# Altium PCB VESC_POWER_75100.PcbDoc (part 2 of 2)
Units mil, origin at the board's own origin, x right, y up, seen from the top; angles counter-clockwise.
Board outline 2834.65 x 2047.24 mil, 4 copper layers (Top Layer, Layer 1, Layer 2, Bottom Layer), stack 62.599 mil thick; 50 components, 18 nets, 120 pads, 1348 vias.
Unrouted connection lines stored in the file: 2.
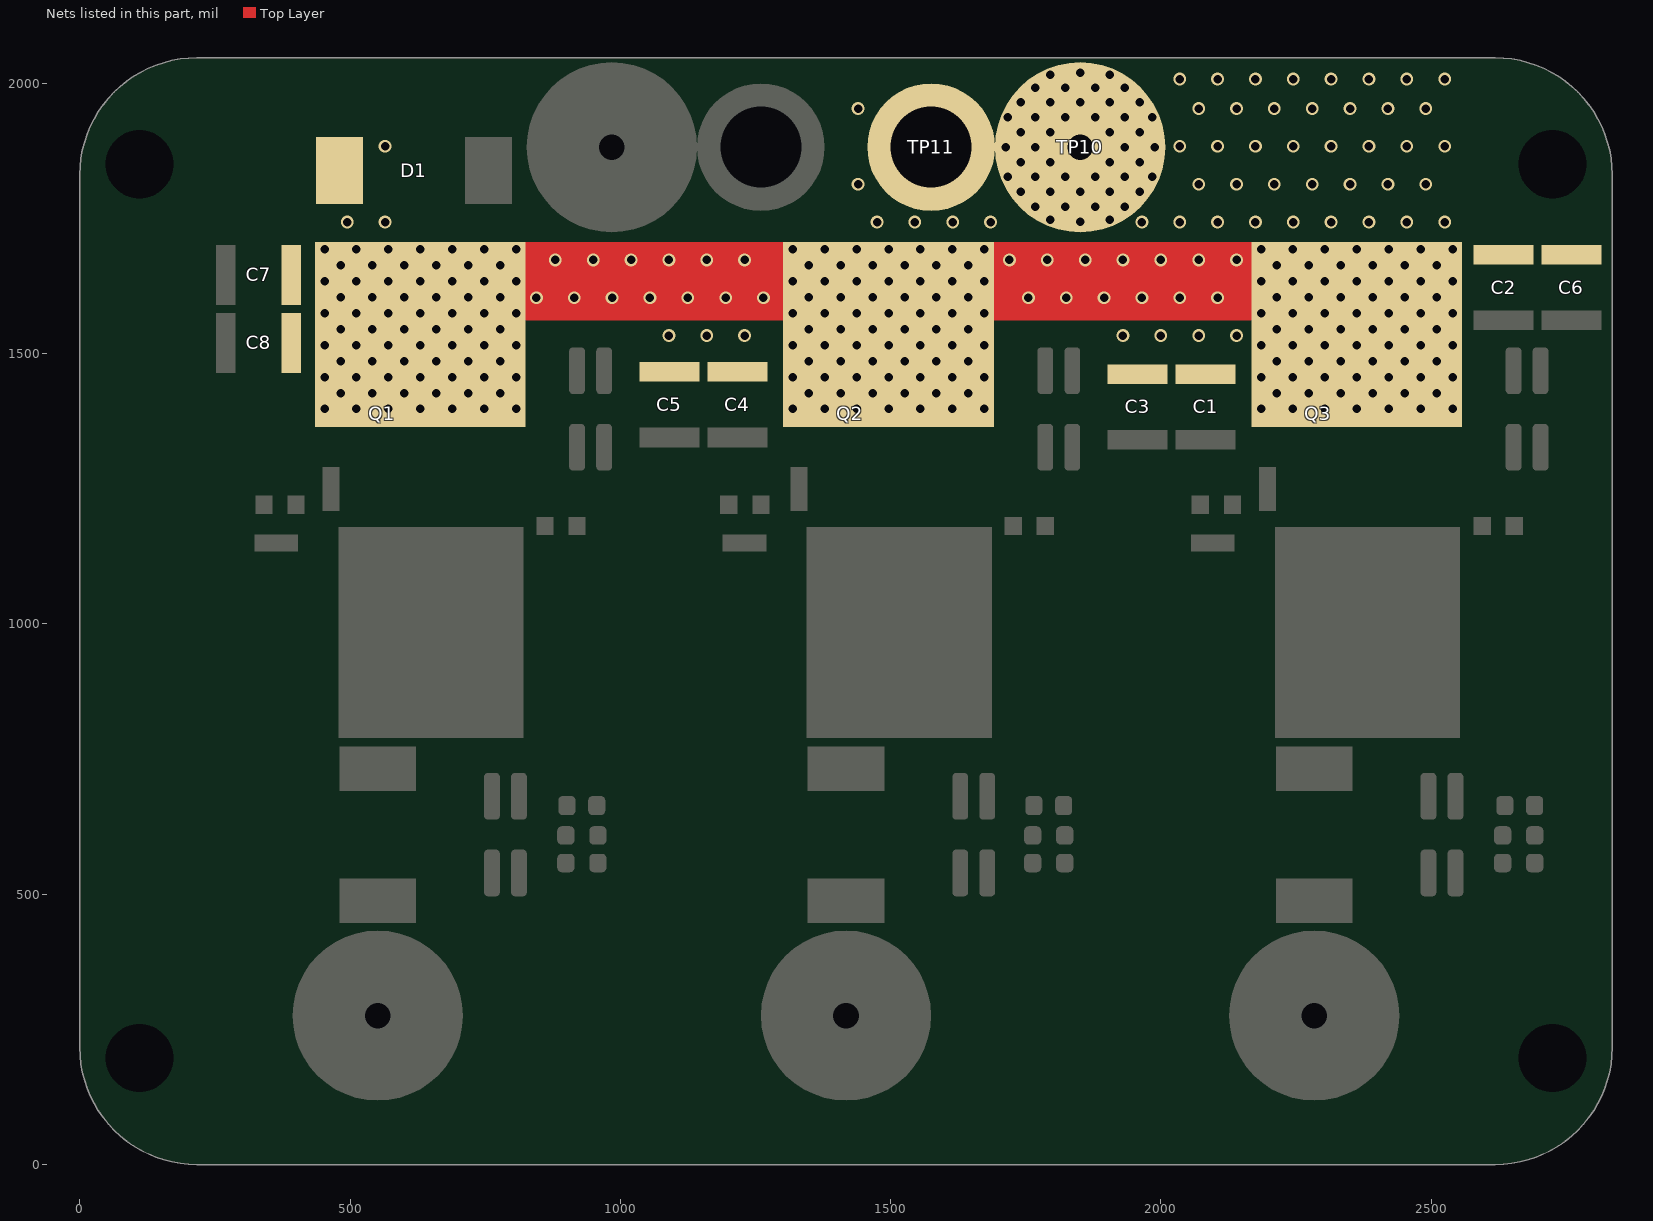
[diagram p4: the nets of this part, all layers, seen from the top]

## Via types
v1: diameter 23.62, hole 15.75, Top Layer to Bottom Layer, tented both sides, 1348 vias

## Nets (pads, with @x,y where several pads share a name; then routed paths per layer and width w, separated by ;. In a path a pad name is that pad's centre, name@x,y a point inside that pad or via, vN(x,y) a via of type N, cw(c..) or ccw(c..) an arc to the next point about the centre after c; other vN are vias at no path point) (continued)
VIN: C1.2 C2.2 C3.2 C4.2 C5.2 C6.2 C7.2 C8.2 D1.1 Q1.2 Q2.2 Q3.2 TP10.1 TP11.1 | length 2011
  Top Layer w19.68: v1(879.68,1673.43) 919.25,1633.86 919.88,1633.23 919.88,1609.69 915.44,1605.24 915.44,1603.74 v1@916.5,1602.67 ; v1(914.68,1603.43) 914.68,1602.36 v1@919.88,1597.16 ; v1(2509.84,1486.22) Q3.2@2527.56,1468.5
  Top Layer w145.67: Q1.2@629.92,1541.34 v1(629.92,1574.8) v1(629.92,1633.86) v1(688.98,1633.86) v1(748.03,1633.86) v1(807.09,1633.86) 919.25,1633.86 1019.68,1633.86 1089.68,1633.86 1264.68,1633.86 v1(1318.9,1633.86) v1(1377.95,1633.86) v1(1437.01,1633.86) v1(1496.06,1633.86) v1(1555.12,1633.86) v1(1614.17,1633.86) v1(1673.23,1633.86) 1824.68,1633.86 1929.68,1633.86 2034.68,1633.86 v1(2185.04,1633.86) v1(2244.09,1633.86) v1(2303.15,1633.86) v1(2362.2,1633.86) ; Q3.2@2362.2,1541.34 v1(2362.2,1574.8) Q3.2@2362.2,1604.33
  other v1: 452.76,1397.64 511.81,1397.64 570.87,1397.64 629.92,1397.64 688.98,1397.64 748.03,1397.64 807.09,1397.64 1318.9,1397.64 1377.95,1397.64 1437.01,1397.64 1496.06,1397.64 1555.12,1397.64 1614.17,1397.64 1673.23,1397.64 2185.04,1397.64 2244.09,1397.64 2303.15,1397.64 2362.2,1397.64 2421.26,1397.64 2480.31,1397.64 2539.37,1397.64 482.28,1427.17 541.34,1427.17 600.39,1427.17 659.45,1427.17 718.5,1427.17 777.56,1427.17 1348.43,1427.17 1407.48,1427.17 1466.54,1427.17 1525.59,1427.17 1584.65,1427.17 1643.7,1427.17 2214.57,1427.17 2273.62,1427.17 2332.68,1427.17 2391.73,1427.17 2450.79,1427.17 2509.84,1427.17 452.76,1456.69 511.81,1456.69 570.87,1456.69 629.92,1456.69 688.98,1456.69 748.03,1456.69 807.09,1456.69 1318.9,1456.69 1377.95,1456.69 1437.01,1456.69 1496.06,1456.69 1555.12,1456.69 1614.17,1456.69 1673.23,1456.69 2185.04,1456.69 2244.09,1456.69 2303.15,1456.69 2362.2,1456.69 2421.26,1456.69 2480.31,1456.69 2539.37,1456.69 482.28,1486.22 541.34,1486.22 600.39,1486.22 659.45,1486.22 718.5,1486.22 777.56,1486.22 1348.43,1486.22 1407.48,1486.22 1466.54,1486.22 1525.59,1486.22 1584.65,1486.22 1643.7,1486.22 2214.57,1486.22 2273.62,1486.22 2332.68,1486.22 2391.73,1486.22 2450.79,1486.22 452.76,1515.75 511.81,1515.75 570.87,1515.75 629.92,1515.75 688.98,1515.75 748.03,1515.75 807.09,1515.75 1318.9,1515.75 1377.95,1515.75 1437.01,1515.75 1496.06,1515.75 1555.12,1515.75 1614.17,1515.75 1673.23,1515.75 2185.04,1515.75 2244.09,1515.75 2303.15,1515.75 2362.2,1515.75 2421.26,1515.75 2480.31,1515.75 2539.37,1515.75 1089.68,1533.43 1159.68,1533.43 1229.68,1533.43 1929.68,1533.43 1999.68,1533.43 2069.68,1533.43 2139.68,1533.43 482.28,1545.28 541.34,1545.28 600.39,1545.28 659.45,1545.28 718.5,1545.28 777.56,1545.28 1348.43,1545.28 1407.48,1545.28 1466.54,1545.28 1525.59,1545.28 1584.65,1545.28 1643.7,1545.28 2214.57,1545.28 2273.62,1545.28 2332.68,1545.28 2391.73,1545.28 2450.79,1545.28 2509.84,1545.28 452.76,1574.8 511.81,1574.8 570.87,1574.8 688.98,1574.8 748.03,1574.8 807.09,1574.8 1318.9,1574.8 1377.95,1574.8 1437.01,1574.8 1496.06,1574.8 1555.12,1574.8 1614.17,1574.8 1673.23,1574.8 2185.04,1574.8 2244.09,1574.8 2303.15,1574.8 2421.26,1574.8 2480.31,1574.8 2539.37,1574.8 844.68,1603.43 984.68,1603.43 1054.68,1603.43 1124.68,1603.43 1194.68,1603.43 1264.68,1603.43 1754.68,1603.43 1824.68,1603.43 1894.68,1603.43 1964.68,1603.43 2034.68,1603.43 2104.68,1603.43 482.28,1604.33 541.34,1604.33 600.39,1604.33 659.45,1604.33 718.5,1604.33 777.56,1604.33 1348.43,1604.33 1407.48,1604.33 1466.54,1604.33 1525.59,1604.33 1584.65,1604.33 1643.7,1604.33 2214.57,1604.33 2273.62,1604.33 2332.68,1604.33 2391.73,1604.33 2450.79,1604.33 2509.84,1604.33 452.76,1633.86 511.81,1633.86 570.87,1633.86 2421.26,1633.86 2480.31,1633.86 2539.37,1633.86 482.28,1663.39 541.34,1663.39 600.39,1663.39 659.45,1663.39 718.5,1663.39 777.56,1663.39 1348.43,1663.39 1407.48,1663.39 1466.54,1663.39 1525.59,1663.39 1584.65,1663.39 1643.7,1663.39 2214.57,1663.39 2273.62,1663.39 2332.68,1663.39 2391.73,1663.39 2450.79,1663.39 2509.84,1663.39 949.68,1673.43 1019.68,1673.43 1089.68,1673.43 1159.68,1673.43 1229.68,1673.43 1719.68,1673.43 1789.68,1673.43 1859.68,1673.43 1929.68,1673.43 1999.68,1673.43 2069.68,1673.43 2139.68,1673.43 452.76,1692.91 511.81,1692.91 570.87,1692.91 629.92,1692.91 688.98,1692.91 748.03,1692.91 807.09,1692.91 1318.9,1692.91 1377.95,1692.91 1437.01,1692.91 1496.06,1692.91 1555.12,1692.91 1614.17,1692.91 1673.23,1692.91 2185.04,1692.91 2244.09,1692.91 2303.15,1692.91 2362.2,1692.91 2421.26,1692.91 2480.31,1692.91 2539.37,1692.91 494.68,1743.43 564.68,1743.43 1474.68,1743.43 1544.68,1743.43 1614.68,1743.43 1684.68,1743.43 1964.68,1743.43 2034.68,1743.43 2104.68,1743.43 2174.68,1743.43 2244.68,1743.43 2314.68,1743.43 2384.68,1743.43 2454.68,1743.43 2524.68,1743.43 1850.39,1744.09 1795.28,1748.03 1905.51,1748.03 1767.72,1771.65 1822.83,1771.65 1877.95,1771.65 1933.07,1771.65 1740.16,1799.21 1795.28,1799.21 1850.39,1799.21 1905.51,1799.21 1960.63,1799.21 1439.68,1813.43 2069.68,1813.43 2139.68,1813.43 2209.68,1813.43 2279.68,1813.43 2349.68,1813.43 2419.68,1813.43 2489.68,1813.43 1716.54,1826.77 1767.72,1826.77 1822.83,1826.77 1877.95,1826.77 1933.07,1826.77 1984.25,1826.77 1740.16,1854.33 1795.28,1854.33 1905.51,1854.33 1960.63,1854.33 1712.6,1881.89 1767.72,1881.89 1933.07,1881.89 1988.19,1881.89 564.68,1883.43 2034.68,1883.43 2104.68,1883.43 2174.68,1883.43 2244.68,1883.43 2314.68,1883.43 2384.68,1883.43 2454.68,1883.43 2524.68,1883.43 1740.16,1909.45 1795.28,1909.45 1905.51,1909.45 1960.63,1909.45 1716.54,1937.01 1767.72,1937.01 1822.83,1937.01 1877.95,1937.01 1933.07,1937.01 1984.25,1937.01 1439.68,1953.43 2069.68,1953.43 2139.68,1953.43 2209.68,1953.43 2279.68,1953.43 2349.68,1953.43 2419.68,1953.43 2489.68,1953.43 1740.16,1964.57 1795.28,1964.57 1850.39,1964.57 1905.51,1964.57 1960.63,1964.57 1767.72,1992.13 1822.83,1992.13 1877.95,1992.13 1933.07,1992.13 2034.68,2007.87 2104.68,2007.87 2174.68,2007.87 2244.68,2007.87 2314.68,2007.87 2384.68,2007.87 2454.68,2007.87 2524.68,2007.87 1795.28,2015.75 1905.51,2015.75 1850.39,2019.69
pads on no net: TP4.1 TP5.1 TP6.1 TP7.1

## Polygon pours and split planes (outlines as drawn)
GND on Top Layer "GND_L01_P130" (solid, remove dead copper, pour order 130): 0,216.54 ccw(c216.54,216.54) 216.54,0 2618.11,0 ccw(c2618.11,216.54) 2834.65,216.54 2834.65,1830.71 ccw(c2618.11,1830.71) 2618.11,2047.24 216.54,2047.24 ccw(c216.54,1830.71) 0,1830.71
SHC on Top Layer "SHC_L01_P105" (solid, pour order 105): 2204.72,694.17 2204.72,1181.11 cw(c2212.6,1181.11) 2212.6,1188.98 ccw(c2212.6,1196.85) 2220.47,1196.85 2220.47,1290.83 cw(c2233.61,1290.83) 2233.61,1303.97 2601.55,1303.97 cw(c2601.55,1291.34) 2614.17,1291.34 2614.17,803.15 cw(c2590.55,803.15) 2590.55,779.53 2385.83,779.53 ccw(c2385.83,755.91) 2362.2,755.91 2362.2,694.17 cw(c2355.04,694.17) 2355.04,687.01 2211.89,687.01 cw(c2211.89,694.17)
SHB on Top Layer "SHB_L01_P103" (solid, pour order 103): 1338.58,694.17 1338.58,1181.11 cw(c1346.46,1181.11) 1346.46,1188.98 ccw(c1346.46,1196.85) 1354.33,1196.85 1354.33,1290.83 cw(c1367.47,1290.83) 1367.47,1303.97 1735.41,1303.97 cw(c1735.41,1291.34) 1748.03,1291.34 1748.03,803.15 cw(c1724.41,803.15) 1724.41,779.53 1519.69,779.53 ccw(c1519.69,755.91) 1496.06,755.91 1496.06,694.17 cw(c1488.9,694.17) 1488.9,687.01 1345.75,687.01 cw(c1345.74,694.17)
SHA on Top Layer "SHA_L01_P102" (solid, pour order 102): 472.44,694.17 472.44,1181.11 cw(c480.32,1181.11) 480.32,1188.98 ccw(c480.32,1196.85) 488.19,1196.85 488.19,1290.83 cw(c501.32,1290.83) 501.32,1303.97 869.27,1303.97 cw(c869.27,1291.34) 881.89,1291.34 881.89,803.15 cw(c858.27,803.15) 858.27,779.53 653.54,779.53 ccw(c653.54,755.91) 629.92,755.91 629.92,694.17 cw(c622.76,694.17) 622.76,687.01 479.6,687.01 cw(c479.6,694.17)
VIN on Top Layer "Top Layer-VIN" (solid, remove dead copper, pour order 128): 340.43,1383.97 ccw(c362.2,1383.97) 362.2,1362.2 826.77,1362.2 ccw(c826.78,1377.94) 842.52,1377.95 842.52,1519.68 cw(c858.27,1519.68) 858.27,1535.43 992.13,1535.43 cw(c992.13,1519.69) 1007.87,1519.69 1007.87,1448.82 ccw(c1023.62,1448.82) 1023.62,1433.07 1259.84,1433.07 cw(c1259.84,1409.45) 1283.46,1409.45 1283.46,1377.95 ccw(c1299.21,1377.95) 1299.21,1362.2 1692.91,1362.2 ccw(c1692.92,1377.95) 1708.66,1377.95 1708.66,1511.81 cw(c1732.28,1511.81) 1732.28,1535.43 1858.27,1535.43 cw(c1858.27,1511.81) 1881.89,1511.81 1881.89,1448.82 ccw(c1897.64,1448.82) 1897.64,1433.07 2133.86,1433.07 cw(c2133.86,1417.33) 2149.61,1417.32 2149.61,1370.08 ccw(c2157.48,1370.08) 2157.48,1362.2 2559.05,1362.2 ccw(c2559.06,1370.07) 2566.93,1370.08 2566.93,1593.78 cw(c2587.32,1593.78) 2587.32,1614.17 2828.08,1614.17 2828.08,1726.73 2587.32,1726.73 cw(c2587.32,1747.12) 2566.93,1747.12 2566.93,2047.24 1417.32,2047.24 1417.32,1732.28 cw(c1396.03,1732.28) 1396.03,1710.99 626.69,1710.99 cw(c626.69,1731.38) 606.3,1731.38 606.3,1889.76 ccw(c582.68,1889.77) 582.68,1913.39 362.2,1913.38 ccw(c362.2,1891.62) 340.43,1891.61
PHA on Top Layer "PHA_L01_P096" (solid, pour order 96): 354.33,385.83 cw(c401.57,385.83) 401.57,433.07 448.82,433.07 ccw(c448.82,456.69) 472.44,456.69 472.44,527.56 cw(c480.32,527.56) 480.32,535.43 622.05,535.43 cw(c622.05,527.56) 629.92,527.56 629.92,456.69 ccw(c653.54,456.69) 653.54,433.07 708.66,433.07 cw(c708.66,385.83) 755.91,385.83 755.91,133.86 cw(c732.28,133.86) 732.28,110.24 377.95,110.24 cw(c377.95,133.86) 354.33,133.86
PHB on Top Layer "PHB_L01_P097" (solid, pour order 97): 1216.54,385.83 cw(c1263.78,385.83) 1263.78,433.07 1311.02,433.07 ccw(c1311.02,456.69) 1334.65,456.69 1334.65,527.56 cw(c1342.52,527.56) 1342.52,535.43 1484.25,535.43 cw(c1484.25,527.56) 1492.13,527.56 1492.13,456.69 ccw(c1515.75,456.69) 1515.75,433.07 1570.87,433.07 cw(c1570.87,385.83) 1618.11,385.83 1618.11,133.86 cw(c1594.49,133.86) 1594.49,110.24 1240.16,110.24 cw(c1240.16,133.86) 1216.54,133.86
PHC on Top Layer "PHC_L01_P101" (solid, pour order 101): 2082.68,385.83 cw(c2129.92,385.83) 2129.92,433.07 2177.17,433.07 ccw(c2177.17,456.69) 2200.79,456.69 2200.79,527.56 cw(c2208.66,527.56) 2208.66,535.43 2350.39,535.43 cw(c2350.39,527.56) 2358.27,527.56 2358.27,456.69 ccw(c2381.89,456.69) 2381.89,433.07 2437.01,433.07 cw(c2437.01,385.83) 2484.25,385.83 2484.25,133.86 cw(c2460.63,133.86) 2460.63,110.24 2106.3,110.24 cw(c2106.3,133.86) 2082.68,133.86
GND on Layer 1 "GND_L02_P111" (solid, pour order 111): 0,216.54 ccw(c216.54,216.54) 216.54,0 2618.11,0 ccw(c2618.11,216.54) 2834.65,216.54 2834.65,1830.71 ccw(c2618.11,1830.71) 2618.11,2047.24 216.54,2047.24 ccw(c216.54,1830.71) 0,1830.71
VIN on Layer 1 "VIN_L02_P110" (solid, pour order 110): 362.2,1362.2 cw(c362.2,1383.97) 340.43,1383.98 340.43,1891.61 cw(c362.2,1891.61) 362.2,1913.39 582.68,1913.39 cw(c582.68,1889.77) 606.3,1889.76 606.3,1740.16 ccw(c629.92,1740.16) 629.92,1716.54 1407.48,1716.54 ccw(c1407.48,1726.38) 1417.32,1726.38 1417.32,2047.24 2566.93,2047.24 2566.93,1370.08 cw(c2559.06,1370.08) 2559.06,1362.2 2157.48,1362.2 cw(c2157.48,1370.08) 2149.61,1370.08 2149.61,1417.32 ccw(c2133.86,1417.32) 2133.86,1433.07 1897.64,1433.07 cw(c1897.64,1448.82) 1881.89,1448.82 1881.89,1511.81 ccw(c1858.27,1511.81) 1858.27,1535.43 1732.28,1535.43 ccw(c1732.28,1511.81) 1708.66,1511.81 1708.66,1377.95 cw(c1692.92,1377.95) 1692.91,1362.2 1299.21,1362.2 cw(c1299.21,1377.95) 1283.46,1377.95 1283.46,1409.45 ccw(c1259.84,1409.45) 1259.84,1433.07 1023.62,1433.07 cw(c1023.62,1448.82) 1007.87,1448.82 1007.87,1519.69 ccw(c992.13,1519.69) 992.13,1535.43 858.27,1535.43 ccw(c858.27,1519.68) 842.52,1519.68 842.52,1377.95 cw(c826.78,1377.95) 826.77,1362.2
PHC on Layer 1 "PHC_L02_P100" (solid, pour order 100): 2082.68,385.83 cw(c2129.92,385.83) 2129.92,433.07 2177.17,433.07 ccw(c2177.17,456.69) 2200.79,456.69 2200.79,527.56 cw(c2208.66,527.56) 2208.66,535.43 2350.39,535.43 cw(c2350.39,527.56) 2358.27,527.56 2358.27,456.69 ccw(c2381.89,456.69) 2381.89,433.07 2437.01,433.07 cw(c2437.01,385.83) 2484.25,385.83 2484.25,133.86 cw(c2460.63,133.86) 2460.63,110.24 2106.3,110.24 cw(c2106.3,133.86) 2082.68,133.86
PHA on Layer 1 "PHA_L02_P098" (solid, pour order 98): 354.33,385.83 cw(c401.57,385.83) 401.57,433.07 448.82,433.07 ccw(c448.82,456.69) 472.44,456.69 472.44,527.56 cw(c480.32,527.56) 480.32,535.43 622.05,535.43 cw(c622.05,527.56) 629.92,527.56 629.92,456.69 ccw(c653.54,456.69) 653.54,433.07 708.66,433.07 cw(c708.66,385.83) 755.91,385.83 755.91,133.86 cw(c732.28,133.86) 732.28,110.24 377.95,110.24 cw(c377.95,133.86) 354.33,133.86
PHB on Layer 1 "PHB_L02_P099" (solid, pour order 99): 1216.54,385.83 cw(c1263.78,385.83) 1263.78,433.07 1311.02,433.07 ccw(c1311.02,456.69) 1334.65,456.69 1334.65,527.56 cw(c1342.52,527.56) 1342.52,535.43 1484.25,535.43 cw(c1484.25,527.56) 1492.13,527.56 1492.13,456.69 ccw(c1515.75,456.69) 1515.75,433.07 1570.87,433.07 cw(c1570.87,385.83) 1618.11,385.83 1618.11,133.86 cw(c1594.49,133.86) 1594.49,110.24 1240.16,110.24 cw(c1240.16,133.86) 1216.54,133.86
SHC on Layer 1 "SHC_L02_P106" (solid, pour order 106): 2204.72,692.2 2204.72,1179.14 cw(c2212.6,1179.14) 2212.6,1187.01 ccw(c2212.6,1194.88) 2220.47,1194.88 2220.47,1288.86 cw(c2233.61,1288.86) 2233.61,1302 2601.55,1302 cw(c2601.55,1289.37) 2614.17,1289.37 2614.17,801.18 cw(c2590.55,801.18) 2590.55,777.56 2385.83,777.56 ccw(c2385.83,753.94) 2362.2,753.94 2362.2,692.2 cw(c2355.04,692.2) 2355.04,685.04 2211.89,685.04 cw(c2211.89,692.2)
SHB on Layer 1 "SHB_L02_P108" (solid, pour order 108): 1338.58,692.2 1338.58,1179.14 cw(c1346.46,1179.14) 1346.46,1187.01 ccw(c1346.46,1194.88) 1354.33,1194.88 1354.33,1288.86 cw(c1367.47,1288.86) 1367.47,1302 1735.41,1302 cw(c1735.41,1289.37) 1748.03,1289.37 1748.03,801.18 cw(c1724.41,801.18) 1724.41,777.56 1519.69,777.56 ccw(c1519.69,753.94) 1496.06,753.94 1496.06,692.2 cw(c1488.9,692.2) 1488.9,685.04 1345.75,685.04 cw(c1345.74,692.2)
SHA on Layer 1 "SHA_L02_P104" (solid, pour order 104): 472.44,694.17 472.44,1181.1 cw(c480.32,1181.1) 480.32,1188.98 ccw(c480.32,1196.85) 488.19,1196.85 488.19,1290.83 cw(c501.32,1290.83) 501.32,1303.96 869.27,1303.96 cw(c869.27,1291.34) 881.89,1291.34 881.89,803.15 cw(c858.27,803.15) 858.27,779.53 653.54,779.53 ccw(c653.54,755.91) 629.92,755.91 629.92,694.17 cw(c622.76,694.17) 622.76,687.01 479.6,687.01 cw(c479.6,694.17)
GND on Layer 2 "GND_L03_P119" (solid, pour order 119): 0,216.54 ccw(c216.54,216.54) 216.54,0 2618.11,0 ccw(c2618.11,216.54) 2834.65,216.54 2834.65,1830.71 ccw(c2618.11,1830.71) 2618.11,2047.24 216.54,2047.24 ccw(c216.54,1830.71) 0,1830.71
VIN on Layer 2 "VIN_L03_P118" (solid, pour order 118): 362.2,1362.2 cw(c362.2,1383.97) 340.43,1383.98 340.43,1891.61 cw(c362.2,1891.61) 362.2,1913.39 582.68,1913.39 cw(c582.68,1889.77) 606.3,1889.76 606.3,1740.16 ccw(c629.92,1740.16) 629.92,1716.54 1407.48,1716.54 ccw(c1407.48,1726.38) 1417.32,1726.38 1417.32,2047.24 2566.93,2047.24 2566.93,1370.08 cw(c2559.06,1370.08) 2559.06,1362.2 2157.48,1362.2 cw(c2157.48,1370.08) 2149.61,1370.08 2149.61,1417.32 ccw(c2133.86,1417.32) 2133.86,1433.07 1897.64,1433.07 cw(c1897.64,1448.82) 1881.89,1448.82 1881.89,1511.81 ccw(c1858.27,1511.81) 1858.27,1535.43 1732.28,1535.43 ccw(c1732.28,1511.81) 1708.66,1511.81 1708.66,1377.95 cw(c1692.92,1377.95) 1692.91,1362.2 1299.21,1362.2 cw(c1299.21,1377.95) 1283.46,1377.95 1283.46,1409.45 ccw(c1259.84,1409.45) 1259.84,1433.07 1023.62,1433.07 cw(c1023.62,1448.82) 1007.87,1448.82 1007.87,1519.69 ccw(c992.13,1519.69) 992.13,1535.43 858.27,1535.43 ccw(c858.27,1519.68) 842.52,1519.68 842.52,1377.95 cw(c826.78,1377.95) 826.77,1362.2
PHC on Layer 2 "PHC_L03_P114" (solid, pour order 114): 2082.68,385.83 cw(c2129.92,385.83) 2129.92,433.07 2177.17,433.07 ccw(c2177.17,456.69) 2200.79,456.69 2200.79,527.56 cw(c2208.66,527.56) 2208.66,535.43 2350.39,535.43 cw(c2350.39,527.56) 2358.27,527.56 2358.27,456.69 ccw(c2381.89,456.69) 2381.89,433.07 2437.01,433.07 cw(c2437.01,385.83) 2484.25,385.83 2484.25,133.86 cw(c2460.63,133.86) 2460.63,110.24 2106.3,110.24 cw(c2106.3,133.86) 2082.68,133.86
PHB on Layer 2 "PHB_L03_P113" (solid, pour order 113): 1216.54,385.83 cw(c1263.78,385.83) 1263.78,433.07 1311.02,433.07 ccw(c1311.02,456.69) 1334.65,456.69 1334.65,527.56 cw(c1342.52,527.56) 1342.52,535.43 1484.25,535.43 cw(c1484.25,527.56) 1492.13,527.56 1492.13,456.69 ccw(c1515.75,456.69) 1515.75,433.07 1570.87,433.07 cw(c1570.87,385.83) 1618.11,385.83 1618.11,133.86 cw(c1594.49,133.86) 1594.49,110.24 1240.16,110.24 cw(c1240.16,133.86) 1216.54,133.86
PHA on Layer 2 "PHA_L03_P112" (solid, pour order 112): 354.33,385.83 cw(c401.57,385.83) 401.57,433.07 448.82,433.07 ccw(c448.82,456.69) 472.44,456.69 472.44,527.56 cw(c480.32,527.56) 480.32,535.43 622.05,535.43 cw(c622.05,527.56) 629.92,527.56 629.92,456.69 ccw(c653.54,456.69) 653.54,433.07 708.66,433.07 cw(c708.66,385.83) 755.91,385.83 755.91,133.86 cw(c732.28,133.86) 732.28,110.24 377.95,110.24 cw(c377.95,133.86) 354.33,133.86
SHC on Layer 2 "SHC_L03_P117" (solid, pour order 117): 2204.72,692.2 2204.72,1179.14 cw(c2212.6,1179.14) 2212.6,1187.01 ccw(c2212.6,1194.88) 2220.47,1194.88 2220.47,1288.86 cw(c2233.61,1288.86) 2233.61,1302 2601.55,1302 cw(c2601.55,1289.37) 2614.17,1289.37 2614.17,801.18 cw(c2590.55,801.18) 2590.55,777.56 2385.83,777.56 ccw(c2385.83,753.94) 2362.2,753.94 2362.2,692.2 cw(c2355.04,692.2) 2355.04,685.04 2211.89,685.04 cw(c2211.89,692.2)
SHB on Layer 2 "SHB_L03_P116" (solid, pour order 116): 1338.58,692.2 1338.58,1179.14 cw(c1346.46,1179.14) 1346.46,1187.01 ccw(c1346.46,1194.88) 1354.33,1194.88 1354.33,1288.86 cw(c1367.47,1288.86) 1367.47,1302 1735.41,1302 cw(c1735.41,1289.37) 1748.03,1289.37 1748.03,801.18 cw(c1724.41,801.18) 1724.41,777.56 1519.69,777.56 ccw(c1519.69,753.94) 1496.06,753.94 1496.06,692.2 cw(c1488.9,692.2) 1488.9,685.04 1345.75,685.04 cw(c1345.74,692.2)
SHA on Layer 2 "SHA_L03_P115" (solid, pour order 115): 472.44,694.17 472.44,1181.1 cw(c480.32,1181.1) 480.32,1188.98 ccw(c480.32,1196.85) 488.19,1196.85 488.19,1290.83 cw(c501.32,1290.83) 501.32,1303.96 869.27,1303.96 cw(c869.27,1291.34) 881.89,1291.34 881.89,803.15 cw(c858.27,803.15) 858.27,779.53 653.54,779.53 ccw(c653.54,755.91) 629.92,755.91 629.92,694.17 cw(c622.76,694.17) 622.76,687.01 479.6,687.01 cw(c479.6,694.17)
GND on Bottom Layer "GND_L04_P127" (solid, pour order 127): 0,216.54 ccw(c216.54,216.54) 216.54,0 2618.11,0 ccw(c2618.11,216.54) 2834.65,216.54 2834.65,1830.71 ccw(c2618.11,1830.71) 2618.11,2047.24 216.54,2047.24 ccw(c216.54,1830.71) 0,1830.71
VIN on Bottom Layer "VIN_L04_P126" (solid, pour order 126): 362.2,1362.2 cw(c362.2,1383.97) 340.43,1383.98 340.43,1891.61 cw(c362.2,1891.61) 362.2,1913.39 582.68,1913.39 cw(c582.68,1889.77) 606.3,1889.76 606.3,1740.16 ccw(c629.92,1740.16) 629.92,1716.54 1407.48,1716.54 ccw(c1407.48,1726.38) 1417.32,1726.38 1417.32,2047.24 2566.93,2047.24 2566.93,1370.08 cw(c2559.06,1370.08) 2559.06,1362.2 2157.48,1362.2 cw(c2157.48,1370.08) 2149.61,1370.08 2149.61,1417.32 ccw(c2133.86,1417.32) 2133.86,1433.07 1897.64,1433.07 cw(c1897.64,1448.82) 1881.89,1448.82 1881.89,1511.81 ccw(c1858.27,1511.81) 1858.27,1535.43 1732.28,1535.43 ccw(c1732.28,1511.81) 1708.66,1511.81 1708.66,1377.95 cw(c1692.92,1377.95) 1692.91,1362.2 1299.21,1362.2 cw(c1299.21,1377.95) 1283.46,1377.95 1283.46,1409.45 ccw(c1259.84,1409.45) 1259.84,1433.07 1023.62,1433.07 cw(c1023.62,1448.82) 1007.87,1448.82 1007.87,1519.69 ccw(c992.13,1519.69) 992.13,1535.43 858.27,1535.43 ccw(c858.27,1519.68) 842.52,1519.68 842.52,1377.95 cw(c826.78,1377.95) 826.77,1362.2
PHC on Bottom Layer "PHC_L04_P122" (solid, pour order 122): 2082.68,385.83 cw(c2129.92,385.83) 2129.92,433.07 2177.17,433.07 ccw(c2177.17,456.69) 2200.79,456.69 2200.79,527.56 cw(c2208.66,527.56) 2208.66,535.43 2350.39,535.43 cw(c2350.39,527.56) 2358.27,527.56 2358.27,456.69 ccw(c2381.89,456.69) 2381.89,433.07 2437.01,433.07 cw(c2437.01,385.83) 2484.25,385.83 2484.25,133.86 cw(c2460.63,133.86) 2460.63,110.24 2106.3,110.24 cw(c2106.3,133.86) 2082.68,133.86
PHB on Bottom Layer "PHB_L04_P121" (solid, pour order 121): 1216.54,385.83 cw(c1263.78,385.83) 1263.78,433.07 1311.02,433.07 ccw(c1311.02,456.69) 1334.65,456.69 1334.65,527.56 cw(c1342.52,527.56) 1342.52,535.43 1484.25,535.43 cw(c1484.25,527.56) 1492.13,527.56 1492.13,456.69 ccw(c1515.75,456.69) 1515.75,433.07 1570.87,433.07 cw(c1570.87,385.83) 1618.11,385.83 1618.11,133.86 cw(c1594.49,133.86) 1594.49,110.24 1240.16,110.24 cw(c1240.16,133.86) 1216.54,133.86
PHA on Bottom Layer "PHA_L04_P120" (solid, pour order 120): 354.33,385.83 cw(c401.57,385.83) 401.57,433.07 448.82,433.07 ccw(c448.82,456.69) 472.44,456.69 472.44,527.56 cw(c480.32,527.56) 480.32,535.43 622.05,535.43 cw(c622.05,527.56) 629.92,527.56 629.92,456.69 ccw(c653.54,456.69) 653.54,433.07 708.66,433.07 cw(c708.66,385.83) 755.91,385.83 755.91,133.86 cw(c732.28,133.86) 732.28,110.24 377.95,110.24 cw(c377.95,133.86) 354.33,133.86
SHC on Bottom Layer "SHC_L04_P125" (solid, pour order 125): 2204.72,692.2 2204.72,1179.14 cw(c2212.6,1179.14) 2212.6,1187.01 ccw(c2212.6,1194.88) 2220.47,1194.88 2220.47,1288.86 cw(c2233.61,1288.86) 2233.61,1302 2601.55,1302 cw(c2601.55,1289.37) 2614.17,1289.37 2614.17,801.18 cw(c2590.55,801.18) 2590.55,777.56 2385.83,777.56 ccw(c2385.83,753.94) 2362.2,753.94 2362.2,692.2 cw(c2355.04,692.2) 2355.04,685.04 2211.89,685.04 cw(c2211.89,692.2)
SHB on Bottom Layer "SHB_L04_P124" (solid, pour order 124): 1338.58,692.2 1338.58,1179.14 cw(c1346.46,1179.14) 1346.46,1187.01 ccw(c1346.46,1194.88) 1354.33,1194.88 1354.33,1288.86 cw(c1367.47,1288.86) 1367.47,1302 1735.41,1302 cw(c1735.41,1289.37) 1748.03,1289.37 1748.03,801.18 cw(c1724.41,801.18) 1724.41,777.56 1519.69,777.56 ccw(c1519.69,753.94) 1496.06,753.94 1496.06,692.2 cw(c1488.9,692.2) 1488.9,685.04 1345.75,685.04 cw(c1345.74,692.2)
SHA on Bottom Layer "SHA_L04_P123" (solid, pour order 123): 472.44,694.17 472.44,1181.1 cw(c480.32,1181.1) 480.32,1188.98 ccw(c480.32,1196.85) 488.19,1196.85 488.19,1290.83 cw(c501.32,1290.83) 501.32,1303.96 869.27,1303.96 cw(c869.27,1291.34) 881.89,1291.34 881.89,803.15 cw(c858.27,803.15) 858.27,779.53 653.54,779.53 ccw(c653.54,755.91) 629.92,755.91 629.92,694.17 cw(c622.76,694.17) 622.76,687.01 479.6,687.01 cw(c479.6,694.17)

## Keep-outs
Keep-Out Layer:
  lines w1: 2618.11,0 ccw(c2618.11,216.54) 2834.65,216.54 2834.65,1830.71 ccw(c2618.11,1830.71) 2618.11,2047.24 ; 2618.11,0 216.54,0 cw(c216.54,216.54) 0,216.54 0,1830.71 cw(c216.54,1830.71) 216.54,2047.24 2618.11,2047.24 ; 2618.11,2047.24 2618.11,2047.24

## Silkscreen, mask and mechanical layers (free items; w line width, h text height)
Top Overlay:
  text "-" at 1123.37,1964.58 h78.74
  text "+" at 1654.86,1960.64 h78.74
  text "U" at 731.58,214.23 h196.85
  text "V" at 1603.46,214.23 h196.85
  text "W" at 2454.52,214.23 h196.85
  text "REV D" at 2482.44,80.87 h31.5
  text "PS 4/7" at 2482.44,31.29 h31.5
Top Solder:
  lines w30: 39.37,316.77 39.37,416.77 ; 39.37,505.17 39.37,605.17 ; 39.37,693.57 39.37,793.57 ; 39.37,881.96 39.37,981.96 ; 39.37,1070.36 39.37,1170.36 ; 39.37,1258.76 39.37,1358.76 ; 39.37,1447.15 39.37,1547.15 ; 39.37,1635.55 39.37,1735.55 ; 114.33,383.43 114.33,483.43 ; 114.33,553.43 114.33,653.43 ; 114.33,723.43 114.33,823.43 ; 114.33,893.43 114.33,993.43 ; 114.33,1063.43 114.33,1163.43 ; 114.33,1233.43 114.33,1333.43 ; 114.33,1403.43 114.33,1503.43 ; 114.33,1573.43 114.33,1673.43 ; 188.98,309.17 188.98,409.17 ; 188.98,498.66 188.98,598.66 ; 188.98,688.14 188.98,788.14 ; 188.98,877.62 188.98,977.62 ; 188.98,1067.1 188.98,1167.1 ; 188.98,1256.59 188.98,1356.59 ; 188.98,1446.07 188.98,1546.07 ; 188.98,1635.55 188.98,1735.55 ; 358.27,477.05 358.27,577.05 ; 358.27,654.72 358.27,754.72 ; 419.67,558.16 419.67,658.16 ; 877.95,148.87 877.95,248.86 ; 877.95,335.48 877.95,435.48 ; 921.26,795.67 921.26,895.67 ; 921.26,986.61 921.26,1086.61 ; 962.6,223.59 962.6,323.59 ; 962.6,392.05 962.6,492.05 ; 984.68,748.43 984.68,848.43 ; 984.68,925.59 984.68,1025.59 ; 1047.24,148.87 1047.24,248.86 ; 1047.24,330.59 1047.24,430.59 ; 1047.24,512.31 1047.24,612.31 ; 1047.24,694.03 1047.24,794.03 ; 1047.24,875.76 1047.24,975.76 ; 1047.24,1057.48 1047.24,1157.48 ; 1118.11,1178.35 1118.11,1278.35 ; 1229.68,463.95 1229.68,563.95 ; 1229.68,641.63 1229.68,741.63 ; 1291.08,545.07 1291.08,645.07 ; 1748.03,149.61 1748.03,249.61 ; 1748.03,336.22 1748.03,436.22 ; 1791.34,796.41 1791.34,896.41 ; 1791.34,987.36 1791.34,1087.36 ; 1832.68,224.33 1832.68,324.33 ; 1832.68,392.79 1832.68,492.79 ; 1854.76,749.17 1854.76,849.17 ; 1854.76,926.33 1854.76,1026.33 ; 1917.32,149.61 1917.32,249.61 ; 1917.32,331.33 1917.32,431.33 ; 1917.32,513.05 1917.32,613.05 ; 1917.32,694.78 1917.32,794.78 ; 1917.32,876.5 1917.32,976.5 ; 1917.32,1058.22 1917.32,1158.22 ; 1984.25,1178.35 1984.25,1278.35 ; 2041.47,1881.89 2141.47,1881.89 ; 2041.47,2007.87 2141.47,2007.87 ; 2048.58,1755.91 2148.58,1755.91 ; 2090.55,465.75 2090.55,565.75 ; 2090.55,643.43 2090.55,743.43 ; 2135.04,1818.9 2235.04,1818.9 ; 2139.68,1944.88 2239.68,1944.88 ; 2151.95,546.86 2151.95,646.86 ; 2232.34,1881.89 2332.34,1881.89 ; 2232.34,2007.87 2332.34,2007.87 ; 2239.45,1755.91 2339.45,1755.91 ; 2325.91,1818.9 2425.91,1818.9 ; 2330.55,1944.88 2430.55,1944.88 ; 2423.2,1881.89 2523.2,1881.89 ; 2423.2,2007.87 2523.2,2007.87 ; 2430.32,1755.91 2530.32,1755.91 ; 2625.98,331.6 2625.98,431.6 ; 2669.29,791.79 2669.29,891.79 ; 2669.29,982.74 2669.29,1082.74 ; 2710.63,388.18 2710.63,488.18 ; 2732.72,744.55 2732.72,844.55 ; 2732.72,921.71 2732.72,1021.71 ; 2795.28,429.07 2795.28,529.07 ; 2795.28,610.8 2795.28,710.8 ; 2795.28,792.52 2795.28,892.52 ; 2795.28,974.24 2795.28,1074.24 ; 2795.28,1155.97 2795.28,1255.97 ; 2795.28,1362.2 2795.28,1462.2
Mechanical 1:
  lines w5: 3.94,216.54 ccw(c220.47,216.54) 220.47,0 2622.05,0 ccw(c2622.05,216.54) 2838.58,216.54 2838.58,1830.71 ccw(c2622.05,1830.71) 2622.05,2047.24 220.47,2047.24 ccw(c220.47,1830.71) 3.94,1830.71 3.94,216.54
Drill Drawing:
  circle w10: c170,2642.92 r27.55
  lines w10: 142.45,2739.33 170,2753.1 197.54,2739.33 183.77,2766.88 197.54,2794.42 170,2780.65 142.45,2794.42 156.23,2766.88 142.45,2739.33 ; 142.45,2918.38 197.54,2918.38 170,2863.29 142.45,2918.38 ; 142.45,2987.25 197.54,2987.25 197.54,3042.34 142.45,3042.34 142.45,2987.25
  lines w15: 92.5,2578.19 3936.86,2578.19 ; 92.5,3074.02 3936.86,3074.02 ; 411.25,2454.23 411.25,3197.97 ; 729.08,2454.23 729.08,3197.97 ; 1305.13,2454.23 1305.13,3197.97 ; 1552.33,2454.23 1552.33,3197.97 ; 1912.22,2454.23 1912.22,3197.97 ; 2593.2,2454.23 2593.2,3197.97 ; 2888.05,2454.23 2888.05,3197.97 ; 3273.32,2454.23 3273.32,3197.97 ; 92.5,2454.23 3936.86,2454.23 3936.86,3197.97 92.5,3197.97 92.5,2454.23
  text "Symbol" at 166.87,3111.2 h72
  text "Count" at 448.44,3111.2 h72
  text "Hole Size" at 766.27,3111.2 h72
  text "Plated" at 1342.32,3111.2 h72
  text "Hole Type" at 1589.52,3111.2 h72
  text "Drill Layer Pair" at 1949.41,3111.2 h72
  text "Via/Pad" at 2630.39,3111.2 h72
  text "Pad Shape" at 2925.24,3111.2 h72
  text "Template" at 3310.5,3111.2 h72
  text "2" at 448.44,2987.25 h60
  text "3.800mm (149.61mil)" at 766.27,2987.25 h60
  text "PTH" at 1342.32,2987.25 h60
  text "Round" at 1589.52,2987.25 h60
  text "Top Layer - Bottom Layer" at 1949.41,2987.25 h60
  text "Pad" at 2630.39,2987.25 h60
  text "Rounded" at 2925.24,2987.25 h60
  text "c420h380x0m440mx20" at 3310.5,2987.25 h60
  text "4" at 448.44,2863.29 h60
  text "3.200mm (125.98mil)" at 766.27,2863.29 h60
  text "NPTH" at 1342.32,2863.29 h60
  text "Round" at 1589.52,2863.29 h60
  text "Top Layer - Bottom Layer" at 1949.41,2863.29 h60
  text "Pad" at 2630.39,2863.29 h60
  text "Rounded" at 2925.24,2863.29 h60
  text "c0hn320" at 3310.5,2863.29 h60
  text "5" at 448.44,2739.33 h60
  text "1.200mm (47.24mil)" at 766.27,2739.33 h60
  text "PTH" at 1342.32,2739.33 h60
  text "Round" at 1589.52,2739.33 h60
  text "Top Layer - Bottom Layer" at 1949.41,2739.33 h60
  text "Pad" at 2630.39,2739.33 h60
  text "Rounded" at 2925.24,2739.33 h60
  text "c152h120" at 3310.5,2739.33 h60
  text "1348" at 448.44,2615.37 h60
  text "0.400mm (15.75mil)" at 766.27,2615.37 h60
  text "PTH" at 1342.32,2615.37 h60
  text "Round" at 1589.52,2615.37 h60
  text "Top Layer - Bottom Layer" at 1949.41,2615.37 h60
  text "Via" at 2630.39,2615.37 h60
  text "Rounded" at 2925.24,2615.37 h60
  text "v60h40m0mx0" at 3310.5,2615.37 h60
  text "1359 Total" at 448.44,2491.42 h60

## Text inside footprints (layer, text, board x,y; h text height)
C9: Mechanical 8 "1" at 891.12,663.93 h25; Mechanical 8 "2" at 946.24,663.93 h25
C10: Mechanical 8 "1" at 1754.78,663.93 h25; Mechanical 8 "2" at 1809.9,663.93 h25
C11: Mechanical 8 "1" at 2625.99,663.93 h25; Mechanical 8 "2" at 2681.1,663.93 h25
Q1: Mechanical 8 "2" at 659.92,1541.34 h25 r180; Mechanical 8 "3" at 645.35,1222.44 h25 r90; Mechanical 8 "1" at 456.38,1226.38 h25 r90
Q2: Mechanical 8 "2" at 1526.06,1541.34 h25 r180; Mechanical 8 "3" at 1511.5,1222.44 h25 r90; Mechanical 8 "1" at 1322.52,1226.38 h25 r90
Q3: Mechanical 8 "1" at 2188.66,1226.38 h25 r90; Mechanical 8 "3" at 2377.64,1222.44 h25 r90; Mechanical 8 "2" at 2392.2,1541.34 h25 r180
Q4: Mechanical 8 "1" at 340.55,1157.8 h25; Mechanical 8 "2" at 655.51,954.25 h25 r90; Mechanical 8 "3" at 336.61,968.82 h25
Q5: Mechanical 8 "1" at 1206.69,1157.8 h25; Mechanical 8 "3" at 1202.76,968.82 h25; Mechanical 8 "2" at 1521.65,954.25 h25 r90
Q6: Mechanical 8 "1" at 2072.83,1157.8 h25; Mechanical 8 "3" at 2068.9,968.82 h25; Mechanical 8 "2" at 2387.8,954.25 h25 r90
R1: Mechanical 8 "2" at 949.61,1173.23 h25; Mechanical 8 "1" at 886.61,1173.23 h25
R2: Mechanical 8 "1" at 1752.76,1173.23 h25; Mechanical 8 "2" at 1815.75,1173.23 h25
R3: Mechanical 8 "2" at 2683.27,1173.23 h25; Mechanical 8 "1" at 2620.28,1173.23 h25
R7: Mechanical 8 "2" at 429.45,1212.6 h25; Mechanical 8 "1" at 366.46,1212.6 h25
R8: Mechanical 8 "2" at 1289.57,1212.6 h25; Mechanical 8 "1" at 1226.57,1212.6 h25
R9: Mechanical 8 "2" at 2161.73,1212.6 h25; Mechanical 8 "1" at 2098.74,1212.6 h25
R10: Mechanical 8 "2" at 869.31,616.68 h25 r180; Mechanical 8 "1" at 943.76,1100.47 h25 r180
R11: Mechanical 8 "1" at 1795.96,616.68 h25 r180; Mechanical 8 "2" at 1732.97,616.68 h25 r180
R12: Mechanical 8 "2" at 2602.33,616.68 h25 r180; Mechanical 8 "1" at 2665.32,616.68 h25 r180
RT1: Mechanical 8 "1" at 932.3,565.5 h25 r180; Mechanical 8 "2" at 869.31,565.5 h25 r180
RT2: Mechanical 8 "1" at 1795.96,565.5 h25 r180; Mechanical 8 "2" at 1732.97,565.5 h25 r180
RT3: Mechanical 8 "1" at 2665.32,565.5 h25 r180; Mechanical 8 "2" at 2602.33,565.5 h25 r180
TP1: Mechanical 8 "1" at 481.18,275.59 h25
TP2: Mechanical 8 "1" at 1347.32,275.59 h25
TP3: Mechanical 8 "1" at 2213.46,275.59 h25
TP8: Mechanical 8 "1" at 1329.84,1881.89 h25 r180
TP9: Mechanical 8 "1" at 1054.25,1881.89 h25 r180
TP10: Mechanical 8 "1" at 1920.39,1881.89 h25 r180
TP11: Mechanical 8 "1" at 1644.8,1881.89 h25 r180